# Altium PCB LEDSEQUEUECER.PcbDoc
Units mm, origin at the board's own origin, x right, y up, seen from the top; angles counter-clockwise.
Board outline 69.21 x 29.46 mm, 2 copper layers (Top Layer, Bottom Layer), stack 1.671 mm thick; 28 components, 26 nets, 77 pads, 16 vias.
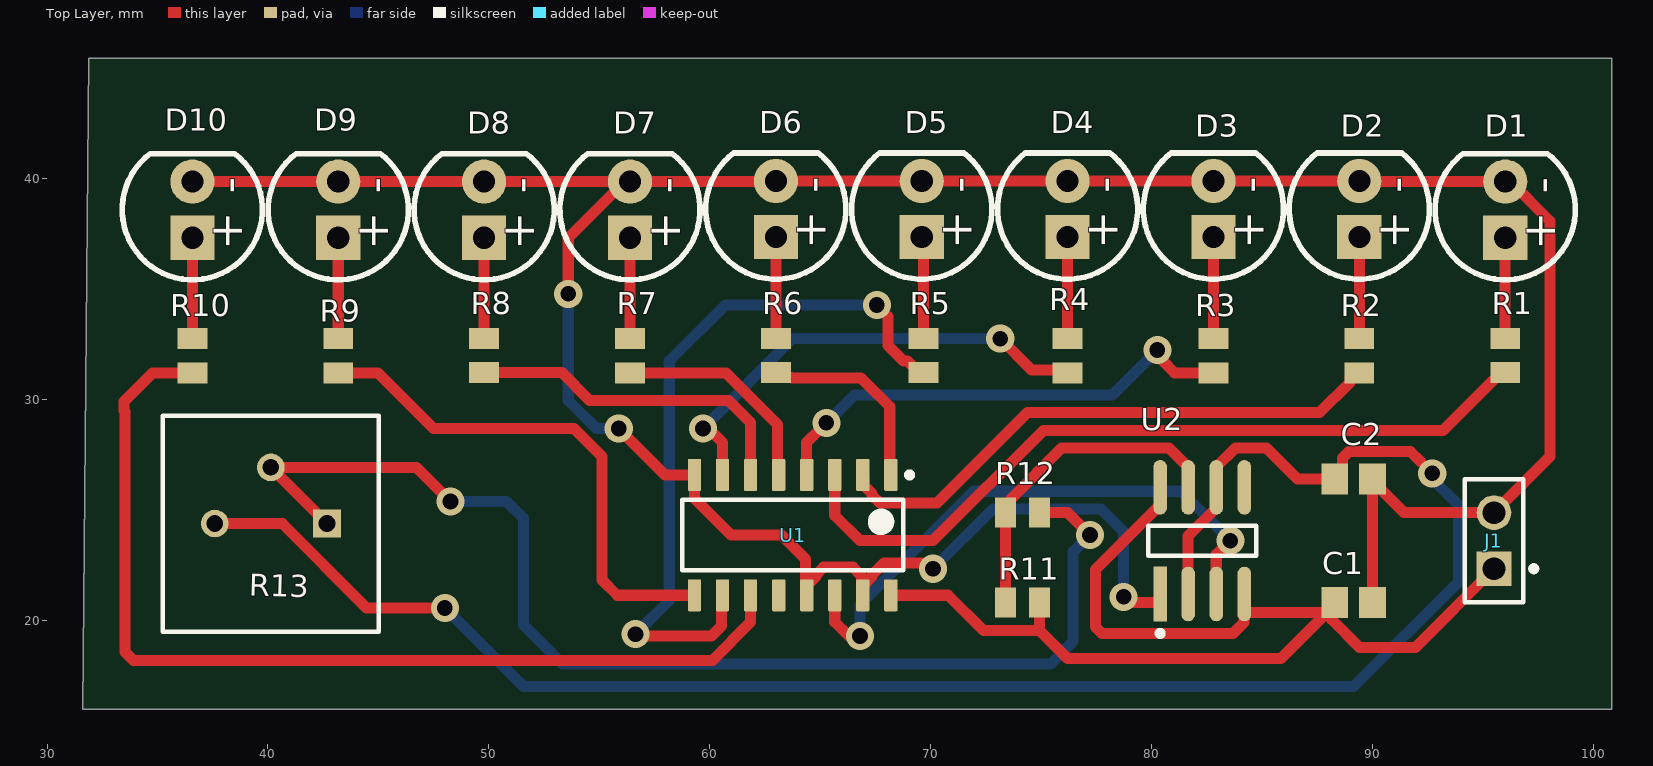
[diagram p0: Top Layer view]
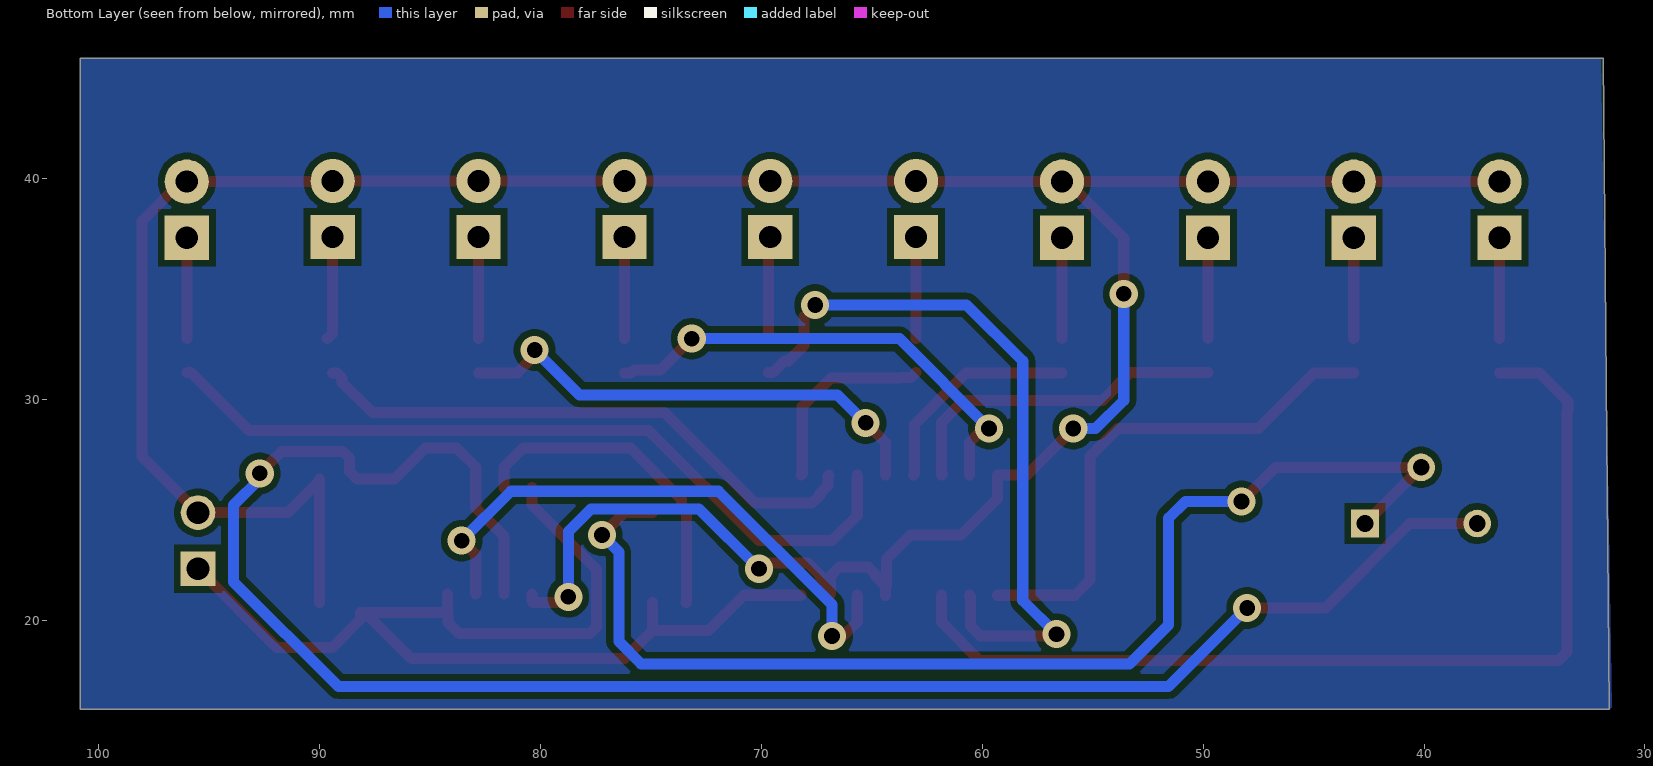
[diagram p1: Bottom Layer view, seen from below]
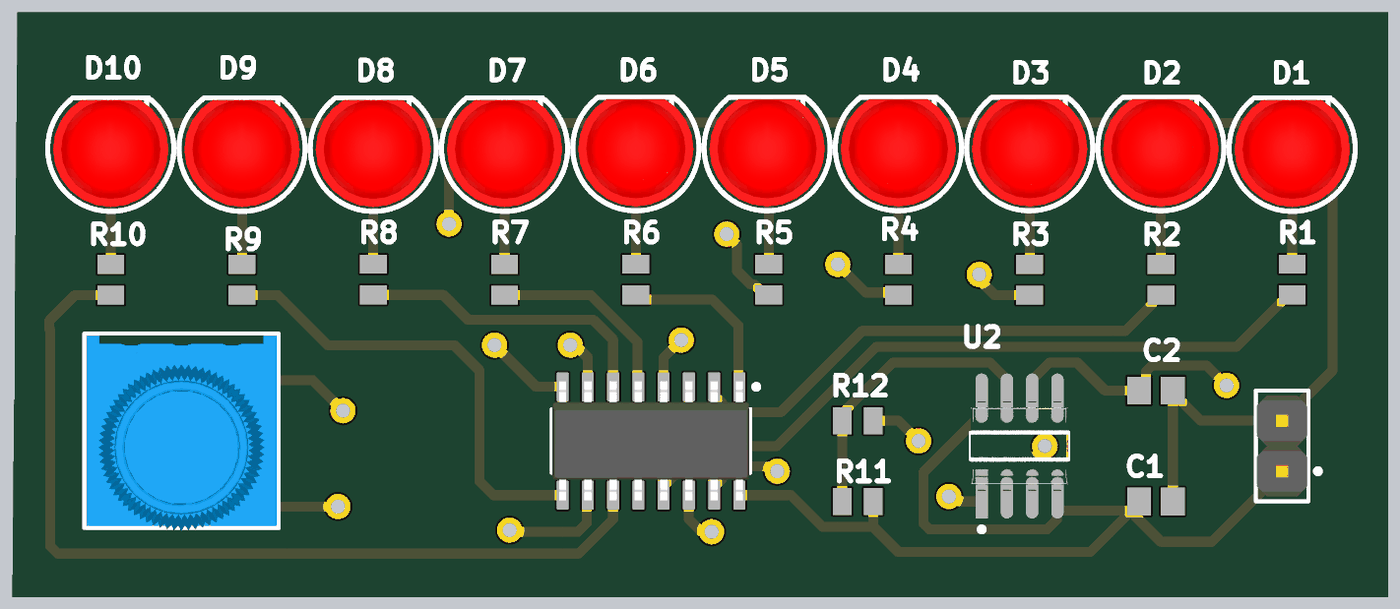
[diagram p2: 3D render of the assembled board from above, using the file's embedded part models]

## Layer stack, top to bottom
Top Solder: solder mask 0.0102, Solder Resist, Dk 3.5
Top Layer: signal copper 0.0356
Dielectric 1: dielectric 1.6, FR-4, Dk 4.8
Bottom Layer: signal copper 0.0356
Bottom Solder: solder mask 0.0102, Solder Resist, Dk 3.5

## Board outline
31.88,45.466 100.838,45.466 100.838,16.002 31.624,16.002

## Design rules (kind name [scope] priority, off if disabled: settings)
Clearance [All] p1: gap=0.3 ignorepadtopadclearanceinfootprint=FALSE
PolygonConnect [All] p1: connectstyle=Relief reliefconductorwidth=0.254 reliefentries=4 polygonreliefangle="90 Angle" airgapwidth=0.254
RoutingVias [All] p1: holewidth=0.3 width=0.6 viastyle="Through Hole" minholewidth=0.3 minwidth=0.6 maxholewidth=0.3 maxwidth=0.6
SilkToSolderMaskClearance [IsPad] p1: minsilkscreentomaskgap=0.1 clearancetoexposedcopper=TRUE
SolderMaskExpansion [All] p1: expansion=0.102 istentingtop=FALSE
UnRoutedNet [All] p1: checkbadconnections=TRUE
Width [All] p1: maxlimit=1 minlimit=0.3 preferedwidth=0.5
28 further rules are at their usual default settings.

## Components (designator, comment, footprint, x,y, rotation, side; value= is the part's Value field where it differs from the comment)
C1 "GRM216R61E105KA12D" CAPC2013X70X45NL10T25 89.154,20.828 r180 top
C2 "GRM216R61E105KA12D" CAPC2013X70X45NL10T25 89.154,26.416 r180 top
D1 "LED_5mm_RED" LED_5mm_RED 96.012,38.608 r90 top
D2 "LED_5mm_RED" LED_5mm_RED 89.408,38.636 r90 top
D3 "LED_5mm_RED" LED_5mm_RED 82.804,38.636 r90 top
D4 "LED_5mm_RED" LED_5mm_RED 76.2,38.636 r90 top
D5 "LED_5mm_RED" LED_5mm_RED 69.596,38.636 r90 top
D6 "LED_5mm_RED" LED_5mm_RED 62.992,38.636 r90 top
D7 "LED_5mm_RED" LED_5mm_RED 56.388,38.608 r90 top
D8 "LED_5mm_RED" LED_5mm_RED 49.784,38.608 r90 top
D9 "LED_5mm_RED" LED_5mm_RED 43.18,38.608 r90 top
D10 "LED_5mm_RED" LED_5mm_RED 36.576,38.608 r90 top
J1 "M20-9990245" FP-M20-9990245-MFG 95.504,23.622 r90 top
R1 "ERJ-6ENF1001V" RESC2013X70X40LL20T20 96.012,32.004 r90 top
R2 "ERJ-6ENF1001V" RESC2013X70X40LL20T20 89.408,31.991 r90 top
R3 "ERJ-6ENF1001V" RESC2013X70X40LL20T20 82.804,31.991 r90 top
R4 "ERJ-6ENF1001V" RESC2013X70X40LL20T20 76.2,31.991 r90 top
R5 "ERJ-6ENF1001V" RESC2013X70X40LL20T20 69.676,32.004 r90 top
R6 "ERJ-6ENF1001V" RESC2013X70X40LL20T20 62.992,32.004 r90 top
R7 "ERJ-6ENF1001V" RESC2013X70X40LL20T20 56.388,31.991 r90 top
R8 "ERJ-6ENF1001V" RESC2013X70X40LL20T20 49.784,32.004 r90 top
R9 "ERJ-6ENF1001V" RESC2013X70X40LL20T20 43.18,31.991 r90 top
R10 "ERJ-6ENF1001V" RESC2013X70X40LL20T20 36.576,31.991 r90 top
R11 "ERJ-6ENF1001V" RESC2013X70X40LL20T20 74.155,20.828 r0 top
R12 "ERJ-6ENF1001V" RESC2013X70X40LL20T20 74.155,24.892 r180 top
R13 "3386P-1-105TLF" FP-3386P-MFG 40.132,24.384 r180 top value=1MΩ
U1 "CD4017BM" D0016A_N 63.754,23.876 r270 top
U2 "NE555DR" FP-D0008A-IPC_A 82.296,23.622 r90 top

## Footprints (in the part's own frame and the unit in brackets; to place one, negate y for a bottom-side part, rotate by r counter-clockwise, add the part's x,y. Pads: shape width x height; smd on the part's side, far side on the other; paste and mask are expansions set on the pad)
CAPC2013X70X45NL10T25 [mm] "Chip Capacitor, 2-Leads, Body 2.00x1.25mm, IPC Medium Density"
  rect 1.2x1.4 smd: 1(-0.85,0) 2(0.85,0)
  body extent -1.05,-0.67 1.05,0.67, height 0.7
D0016A_N [mm] "SOIC, 16-Leads, Body 10x4mm, Pitch 1.27mm, IPC Medium Density"
  rrect17% 1.45x0.6 smd: 1(-2.725,4.445) 2(-2.725,3.175) 3(-2.725,1.905) 4(-2.725,0.635) 5(-2.725,-0.635) 6(-2.725,-1.905) 7(-2.725,-3.175) 8(-2.725,-4.445) 9(2.725,-4.445) 10(2.725,-3.175) 11(2.725,-1.905) 12(2.725,-0.635) 13(2.725,0.635) 14(2.725,1.905) 15(2.725,3.175) 16(2.725,4.445)
  silkscreen extent -2.85,-5 1.6,5.42, body extent -3,-4.95 3,4.95, height 1.59
FP-3386P-MFG [mm]
  rect 1.25x1.25 hole 0.75 paste-1000 mask+0: 1(-2.54,-0.015)
  round 1.25 hole 0.75 paste-1000 mask+0: 2(0,-2.555) 3(2.54,-0.015)
  silkscreen extent -4.89,-4.89 4.89,4.89, body extent -4.99,-4.99 4.99,4.99, height 0.25
FP-D0008A-IPC_A [mm]
  rect 2.469x0.622 smd paste+0 mask+0: 1(-2.414,1.905)
  rrect100% 2.469x0.622 smd paste+0 mask+0: 2(-2.414,0.635) 3(-2.414,-0.635) 4(-2.414,-1.905) 5(2.414,-1.905) 6(2.414,-0.635) 7(2.414,0.635) 8(2.414,1.905)
  silkscreen extent -4.32,-2.45 0.68,2.45, body extent -4.15,-2.95 4.15,2.95, height 0.25
FP-M20-9990245-MFG [mm]
  rect 1.57x1.57 hole 1.02 paste-1000 mask+0: 1(-1.27,0)
  round 1.57 hole 1.02 paste-1000 mask+0: 2(1.27,0)
  silkscreen extent -2.79,-1.92 2.79,1.32, body extent -2.89,-1.42 2.89,1.42, height 0.25
LED_5mm_RED [mm]
  rect 2x2 hole 1: 1(-1.27,0)
  round 2 hole 1: 2(1.27,0)
  silkscreen extent -3.17,-3.17 2.54,3.17, body extent -2.94,-2.9 2.45,2.9, height 8.72
RESC2013X70X40LL20T20 [mm] "Chip Resistor, 2-Leads, Body 2.00x1.25mm, IPC High Density"
  rect 0.95x1.35 smd: 1(-0.775,0) 2(0.775,0)
  body extent -1.1,-0.72 1.1,0.72, height 0.7

## Part data
C1 C2: library part CMP-2007-00957-1, Manufacturer=Murata, Part Number=GRM216R61E105KA12D
D1 D2 D3 D4 D5 D6 D7 D8 D9 D10: "LED PTH 5mm Red."
J1: library part CMP-15831-000105-1, "CONN HEADER VERT 2POS 2.54MM", Case/Package=SIL, Color=Black, Contact Resistance=25mR, Current=3A, Flammability Rating="UL94 V-0", Insulation Resistance=10GR, Max Operating Temperature=105°C, Min Operating Temperature=-40°C, Package Quantity=1000, Voltage=50V, Voltage Rating (AC)=750V, Connector Type="Male Pin", Contact Finish - Mating=GOLD, Contact Material=Brass, Contact Mating Length=0.24inch, Contact Plating=Gold, Contact Shape=Square, Contact Type="Male Pin", Current Rating=3A, Depth=2.54mm, Fastening Type=Pull, Gender=Male, Height=0.12inch, Housing Color=Black, Housing Material=Nylon, Insulation Color=Black, Insulation Material=Nylon, Lead Pitch=2.54mm, Length=5.08mm, Mated Stacking Heights=16.54mm, Mating Cycles=300, Max Current Rating=3A, Mount="Through Hole", Number of Contacts=2, Number of Poles=2, Number of Positions=2, Number of Rows=1, Orientation=Straight, Packaging=Bulk, Pitch=2.54mm, Radiation Hardening=No, Reach SVHC Compliant=Yes, Series=M20, Termination=Solder, Weight=0.25lb, Width=0.25inch, Working Voltage=750V
R1 R2 R3 R4 R5 R6 R7 R8 R9 R10 R11 R12: library part CMP-2001-04375-5, "Chip Resistor, 1 KOhm, +/- 1%, 0.125 W, -55 to 155 degC, 0805 (2012 Metric), RoHS, Tape and Reel", Manufacturer=Panasonic, Max Operating Temperature="155 degC", Min Operating Temperature="-55 degC", Package Quantity=1, Voltage Rating="150 V", ComponentLink1Description="Manufacturer URL", ComponentLink1URL=http://www.panasonic.com/, ComponentLink2Description=Datasheet, ComponentLink2URL=http://industrial.panasonic.com/cdbs/www-data/pdf/RDA0000/AOA0000C86.pdf, DatasheetVersion=04/2015, Height="0.6 mm", Length="2 mm", Mount="Surface Mount", Mounting Technology="Surface Mount", PackageDescription="2-Pin Surface Mount Device, Body 2 x 1.25 mm", PackageReference=0805, Packaging="Cut Tape", REACH SVHC=Yes, RoHSCompliant=true
R13: library part CMP-07234-000020-1, "TRIMMER 1M OHM 0.5W PC PIN TOP", Manufacturer="Bourns Inc.", Package=3386P, Power Rating=0.5W, Resistance=1MΩ, Temperature="-55°C to +125°C", Temperature Coefficient=100ppm/°C, Temperature Range High=+125°C, Temperature Range Low=-55°C, Tolerance=10%, Automotive=No, Category=Res, ComponentLink2Description=Datasheet, ComponentLink2URL=https://www.bourns.com/docs/Product-Datasheets/3386.pdf, Composition=Cermet, Device Class L1="Passive Components", Device Class L2=Resistors, Device Class L3="Variable Resistors and Potentiometers", Digikey Description="TRIMMER 1M OHM 0.5W PC PIN TOP", Height=5.08mm, Lead Free=Yes, Manufacturer Part Number=3386P-1-105TLF, Mouser Description="Trimmer Resistors - Through Hole 3/8 1Mohms 10% 0.5Watts Square", Octopart=https://octopart.com/3386p-1-105tlf-bourns-2025467, RoHS=TRUE, Series=3386, Standoff Height=0.38mm
U1: library part CMP-1623-00071-2, "CMOS Decade Counter with 10 Decoded Outputs, D0016A, TUBE", F @ Nom Voltage(Max)(Mhz)=8, Generic Part Number=CD4017B, ICC @ Nom Voltage(Max)(mA)=0.03, Manufacturer="Texas Instruments", Operating Temperature Range(C)="-55 to 125", Rating=Military, tpd @ Nom Voltage(Max)(ns)=270, Voltage(Nom)(V)=10, Bits(#)=10, Code_JEDEC="MS-012 variation AC", DatasheetVersion=SCHS027C, Function=Counter, Input Type=CMOS, Inputs=1, Output Drive (IOL/IOH)(Max)(mA)=1.5/-1.5, Output Type=CMOS, PackageReference=D0016A, Schmitt Trigger=No, Technology Family=CD4000, Type=Decade, VCC(Max)(V)=18, VCC(Min)(V)=3
U2: library part CMP-1685-00007-2, "IC OSC SGL TIMER 100KHZ 8-SOIC", Case/Package=SOIC, Frequency=100kHz, High Level Output Current=-200mA, Low Level Output Current=200mA, Max Operating Temperature=70°C, Max Supply Voltage=16V, Min Operating Temperature=0°C, Min Supply Voltage=4.5V, Operating Supply Current=10mA, Package Quantity=2500, Quiescent Current=15mA, Contact Plating=Gold, Height=1.58mm, Lead Free="Lead Free", Length=4.9mm, Mount="Surface Mount", Number of Pins=8, Number of Timers/Counters=1, Packaging="Tape and Reel", Radiation Hardening=No, REACH SVHC="No SVHC", Weight=0.002561oz, Width=3.91mm

## Via types
v1: diameter 1.27, hole 0.711, Top Layer to Bottom Layer, 16 vias

## Nets (pads, with @x,y where several pads share a name; then routed paths per layer and width w, separated by ;. In a path a pad name is that pad's centre, name@x,y a point inside that pad or via, vN(x,y) a via of type N, cw(c..) or ccw(c..) an arc to the next point about the centre after c; other vN are vias at no path point)
GND: C1.1 C2.1 D1.2 D2.2 D3.2 D4.2 D5.2 D6.2 D7.2 D8.2 D9.2 D10.2 J1.2 U1.8 U1.13 U1.15 U2.1 | length 136.4
  Top Layer w0.5: D10.2 D9.2 D8.2 D7.2@56.15,39.878 ; v1@53.594,35.052 53.594,37.322 D7.2@56.15,39.878 ; v1@56.304,28.278 57.981,26.601 U1.8 59.309,25.527 60.959,23.877 63.245,23.877 64.339,22.783 U1.13@64.339,21.576 ; U1.13 64.389,21.576 64.809,21.996 64.809,22.074 65.161,22.426 66.474,22.426 66.879,22.021 66.879,21.201 U1.15 66.929,21.576 67.348,21.995 67.348,22.072 67.881,22.606 v1@69.596,22.606 ; v1@79.248,20.828 80.33,20.828 80.391,20.889 U2.1 ; C1.1 C2.1@90.004,26.316 ; C2.1 C2.1@90.004,26.316 ; D7.2@56.15,39.878 D7.2 56.402,39.892 62.978,39.892 D6.2 D5.2 D4.2 D3.2 D2.2 89.422,39.892 95.998,39.892 D1.2 96.25,39.878 98.044,38.084 98.044,27.432 J1.2 91.428,24.892 C2.1@90.004,26.316
  Bottom Layer w0.5: v1(53.594,34.798) 53.594,29.972 54.864,28.702 v1(55.88,28.702) ; v1(70.104,22.352) 72.813,25.061 77.707,25.061 78.74,24.028 v1(78.74,21.082)
NetC2_2: C2.2 R13.3 U2.2 U2.6 | length 84
  Top Layer w0.5: R13.3 40.644,24.399 44.469,20.574 v1(48.006,20.574) ; U2.2 81.661,23.842 82.931,25.112 U2.6 82.931,26.959 83.792,27.82 85.197,27.82 86.601,26.416 C2.2 88.654,26.766 88.654,27.373 88.947,27.666 91.714,27.666 92.202,27.178
  Bottom Layer w0.5: v1(48.006,20.574) 51.562,17.018 89.154,17.018 93.895,21.759 93.895,25.231 v1@92.71,26.416
  other v1: 92.71,26.67
NetD1_1: D1.1 R1.2 | length 4.6
  Top Layer w0.5: R1.2 D1.1
NetD2_1: D2.1 R2.2 | length 4.7
  Top Layer w0.5: D2.1 89.408,33.004 89.633,32.779 R2.2@89.662,32.779
NetD3_1: D3.1 R3.2 | length 4.6
  Top Layer w0.5: R3.2 D3.1
NetD4_1: D4.1 R4.2 | length 4.6
  Top Layer w0.5: R4.2 D4.1
NetD5_1: D5.1 R5.2 | length 4.6
  Top Layer w0.5: D5.1 69.676,37.286 R5.2 R5.2@69.647,32.779
NetD6_1: D6.1 R6.2 | length 4.6
  Top Layer w0.5: R6.2 D6.1
NetD7_1: D7.1 R7.2 | length 4.6
  Top Layer w0.5: R7.2 D7.1
NetD8_1: D8.1 R8.2 | length 4.6
  Top Layer w0.5: R8.2 D8.1
NetD9_1: D9.1 R9.2 | length 4.6
  Top Layer w0.5: R9.2 D9.1
NetD10_1: D10.1 R10.2 | length 4.6
  Top Layer w0.5: R10.2 D10.1
NetR1_1: R1.1 U1.3 | length 35.8
  Top Layer w0.5: U1.3 65.659,24.765 66.802,23.622 70.104,23.622 75.102,28.62 93.203,28.62 95.812,31.229 R1.1
NetR2_1: R2.1 U1.2 | length 25.9
  Top Layer w0.5: U1.2 66.979,26.551 66.979,26.126 67.349,25.756 67.349,25.678 67.701,25.326 68.697,25.326 70.284,25.326 74.378,29.42 87.612,29.42 88.983,30.791 88.983,30.991 89.208,31.216 R2.1
NetR3_1: R3.1 U1.4 | length 21.2
  Top Layer w0.5: U1.4 64.389,28.067 v1@65.024,28.702 ; v1@80.518,31.75 81.052,31.216 R3.1
  Bottom Layer w0.5: v1(65.278,28.956) 66.548,30.226 78.232,30.226 v1(80.264,32.258)
NetR4_1: R4.1 U1.7 | length 20.8
  Top Layer w0.5: v1@60.198,28.448 60.579,28.067 U1.7 ; v1(73.152,32.766) 74.567,31.351 75.775,31.351 75.91,31.216 R4.1
  Bottom Layer w0.5: v1(59.69,28.702) 63.754,32.766 v1(73.152,32.766)
NetR5_1: R5.1 U1.10 | length 32.4
  Top Layer w0.5: v1(56.642,19.389) 56.727,19.304 60.083,19.304 60.529,19.75 60.529,21.101 U1.10 ; 68.072,33.782 68.072,32.455 68.773,31.754 68.951,31.754 69.476,31.229 R5.1
  Bottom Layer w0.5: v1(56.642,19.389) 58.166,20.913 58.166,31.75 60.706,34.29 v1(67.564,34.29)
NetR6_1: R6.1 U1.1 | length 8.9
  Top Layer w0.5: R6.1 63.217,31.004 63.694,31.004 63.71,30.988 66.85,30.988 67.143,30.695 68.149,29.689 68.149,26.651 U1.1
NetR7_1: R7.1 U1.5 | length 9.9
  Top Layer w0.5: R7.1 60.732,31.216 63.069,28.879 63.069,26.651 U1.5
NetR8_1: R8.1 U1.6 | length 15.4
  Top Layer w0.5: R8.1 53.305,31.229 54.562,29.972 60.845,29.972 61.849,28.968 U1.6 U1.6@61.799,26.651
NetR9_1: R9.1 U1.9 | length 23.6
  Top Layer w0.5: R9.1 44.984,31.216 47.5,28.7 53.85,28.7 55.118,27.432 55.118,21.844 55.811,21.151 U1.9
NetR10_1: R10.1 U1.11 | length 45.4
  Top Layer w0.5: R10.1 34.772,31.216 33.481,29.925 33.481,29.511 33.528,29.464 33.528,18.581 33.905,18.204 60.114,18.204 61.849,19.939 U1.11
NetR11_1: R11.1 R12.2 U2.7 | length 15.1
  Top Layer w0.5: R11.1 73.406,20.828 73.38,20.854 R12.2 73.605,25.117 73.605,25.495 75.93,27.82 80.8,27.82 81.661,26.959 U2.7
NetR12_1: R12.1 R13.1 R13.2 | length 54
  Top Layer w0.5: R13.1 R13.2 46.721,26.939 v1@48.006,25.654 ; R12.1 76.2,24.892 v1@76.962,24.13
  Bottom Layer w0.5: v1(48.26,25.4) 50.8,25.4 51.562,24.638 51.562,19.812 53.34,18.034 75.438,18.034 76.454,19.05 76.454,23.114 v1(77.216,23.876)
NetU1_14: U1.14 U2.3 | length 25.7
  Top Layer w0.5: U1.14 65.659,19.939 v1@66.294,19.304 ; U2.3 82.931,22.987 v1@83.312,23.368
  Bottom Layer w0.5: v1(66.802,19.304) 66.802,20.726 71.937,25.861 81.327,25.861 v1(83.566,23.622)
VCC: C1.2 J1.1 R11.2 U1.16 U2.4 U2.8 | length 52.4
  Top Layer w0.5: U1.16 70.793,21.151 72.386,19.558 74.93,19.558 ; R11.2 74.93,19.558 ; U2.8 80.391,25.236 77.47,22.315 77.47,19.717 77.763,19.424 83.686,19.424 84.178,19.916 84.178,20.411 U2.4@84.201,20.434 ; U2.4 U2.4@84.201,20.434 ; C1.2@88.138,20.378 88.138,20.066 89.408,18.796 91.948,18.796 J1.1 ; 74.93,19.558 76.2,18.288 85.852,18.288 87.942,20.378 84.257,20.378 U2.4@84.201,20.434
pads on no net: U1.12 U2.5

## Polygon pours and split planes (outlines as drawn)
no net on Bottom Layer "NONET_L02_P000" (solid, pour order 0): 31.496,16.002 100.838,16.002 100.838,45.466 32.004,45.466

## Text inside footprints (layer, text, board x,y; h text height)
D1: Top Overlay "+" at 98.278,36.781 h1.52 r90; Top Overlay "-" at 98.405,39.321 h1.52 r90
D2: Top Overlay "+" at 91.674,36.809 h1.52 r90; Top Overlay "-" at 91.801,39.349 h1.52 r90
D3: Top Overlay "+" at 85.07,36.809 h1.52 r90; Top Overlay "-" at 85.197,39.349 h1.52 r90
D4: Top Overlay "+" at 78.466,36.809 h1.52 r90; Top Overlay "-" at 78.593,39.349 h1.52 r90
D5: Top Overlay "+" at 71.862,36.809 h1.52 r90; Top Overlay "-" at 71.989,39.349 h1.52 r90
D6: Top Overlay "+" at 65.258,36.809 h1.52 r90; Top Overlay "-" at 65.385,39.349 h1.52 r90
D7: Top Overlay "+" at 58.654,36.781 h1.52 r90; Top Overlay "-" at 58.781,39.321 h1.52 r90
D8: Top Overlay "+" at 52.05,36.781 h1.52 r90; Top Overlay "-" at 52.177,39.321 h1.52 r90
D9: Top Overlay "+" at 45.446,36.781 h1.52 r90; Top Overlay "-" at 45.573,39.321 h1.52 r90
D10: Top Overlay "+" at 38.842,36.781 h1.52 r90; Top Overlay "-" at 38.969,39.321 h1.52 r90